# EAGLE board BMSv5_BatLength (EAGLE 7.6.0)
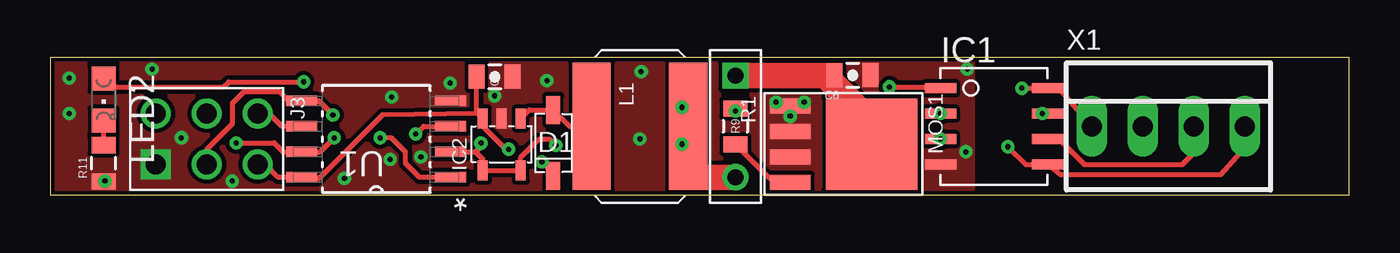
[diagram p0: board, top side]
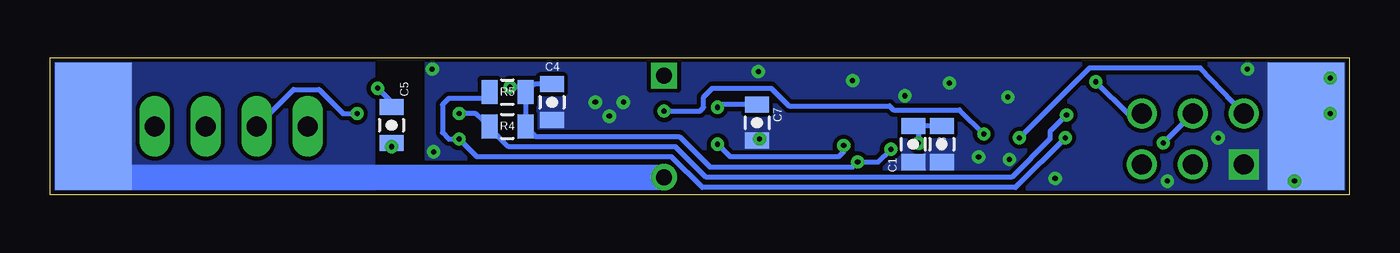
[diagram p1: board, bottom side, seen from below]

Size 64.77 x 6.86 mm. Coordinates in mm from the lower left corner, seen from the top.
Outline: 0,0 64.77,0 64.77,6.86 0,6.86 0,0
Copper layers (1*16): Top 0.035mm / dielectric 1.5mm / Bottom 0.035mm
Design rules "PCBWAY *": minimum track width 10mil, minimum drill 10mil, track to track 8mil, track to pad 8mil, pad to pad 8mil, via to via 8mil, smd to smd 8mil, copper to edge 8mil, drill to drill 8mil, minimum pad ring 10mil, minimum via ring 8mil, stop-mask expansion 4mil, vias tented up to drill 0mil, thermal gap 10mil

## Footprints (pad centres in the part's own frame; a part is rotated, then mirrored left to right if it is on the bottom)
0805-CAP = smd 0.8 x 1.2: 1 -0.9,0; 2 0.9,0
SOD-123 = smd 1.4 x 0.7: ANODE 0,0; CATHODE 3.3,0
SOIC-8 = smd 1.575 x 0.508: P$1 0,3.81; P$2 0,2.54; P$3 0,1.27; P$4 0,0; P$5 5.334,0; P$6 5.334,1.27; P$7 5.334,2.54; P$8 5.334,3.81
SOT-23 = smd 1 x 0.5: 1 1.29,-0.92; 2 1.29,0.03; 3 1.29,0.98; 4 -1.31,0.98; 5 -1.31,-0.92
SMD_PAD_.15X.25 = smd 3.81 x 6.35: P$1 0,0
2X3PIN_.1' = drill 0.991: P$1 -1.27,1.27; P$2 1.27,1.27; P$3 -1.27,-1.27; P$4 1.27,-1.27; P$5 -1.27,-3.81 | drill 0.991 square: P$6 1.27,-3.81
6X6MM_IND = smd 1.905 x 6.35: P$1 -2.413,0; P$2 2.413,0
CHIPLED_0805 = smd 1.2 x 1.2: A 0,-1.05; C 0,1.05
LFPAK = smd 0.762 x 2.032: P$1 0,0; P$2 1.27,0; P$3 2.54,0; P$4 3.81,0 | smd 4.572 x 4.572: P$5 1.905,4.064
TO-220-2 = drill 0.8 square: P$1 -2.54,0 | drill 0.8: P$2 2.54,0
0805 = smd 0.8 x 1.2: 1 -0.9,0; 2 0.9,0
SOIC127P798X216-8N = smd 1.549 x 0.533: 1 -3.708,1.905; 2 -3.708,0.635; 3 -3.708,-0.635; 4 -3.708,-1.905; 5 3.708,-1.905; 6 3.708,-0.635; 7 3.708,0.635; 8 3.708,1.905
22-23-2041 = drill 1 long: 1 -3.81,0; 2 -1.27,0; 3 1.27,0; 4 3.81,0

## Placement (x,y rotation side)
C1  10uF  [0805-CAP]  21.74,2.54 90 bottom
C2  10uF  [0805-CAP]  22.16,5.91 0 top
C3  10uF  [0805-CAP]  20.32,2.54 270 bottom
C4  10uF  [0805-CAP]  39.75,4.64 270 bottom
C5  10uF  [0805-CAP]  47.75,3.49 270 bottom
C6  10uF  [0805-CAP]  40.01,5.98 0 top
C7  10uF  [0805-CAP]  29.53,3.62 270 bottom
D1  DIODE_SCHOTTKYSOD-123  [SOD-123]  25.08,4.25 270 top
IC1  SI8600_DUALCHANNELISO  [SOIC-8]  44.39,1.52 0 top
IC2  SP6641  [SOT-23]  22.54,2.54 90 top
J1  CONNECTOR_1PIN  [SMD_PAD_.15X.25]  62.61,3.43 0 bottom
J2  CONNECTOR_1PIN  [SMD_PAD_.15X.25]  2.16,3.43 0 bottom
J3  ISPHEADER  [2X3PIN_.1']  9.08,2.79 270 top
L1  22uH  [6X6MM_IND]  29.4,3.43 0 top
LED2  [CHIPLED_0805]  2.67,4.76 180 top
MOS1  MOS_N_LOGIC_PSMN7R0  [LFPAK]  36.89,4.45 270 top
R1  .37  [TO-220-2]  34.16,3.43 270 top
R4  10k  [0805]  41.97,3.43 0 bottom
R5  10k  [0805]  41.97,5.14 0 bottom
R9  180  [0805]  34.16,3.43 270 top
R11  390  [0805]  2.67,1.59 90 top
U1  ATTINY85-20SU  [SOIC127P798X216-8N]  16.26,2.79 180 top
X1  22-23-2041  [22-23-2041]  55.75,3.43 0 top

## Library data of the parts
C1-C7 = SparkFun-Capacitors; PROD_ID: CAP-11330
D1 IC1 IC2 J1-J3 L1 MOS1 R1 = lolomolo
LED2 = adafruit
R4 R5 R9 R11 = SparkFun-Resistors; PROD_ID: RES-11622
U1 = Atmel_By_element14_Batch_1-00; MPN: ATTINY85-20SU; OC_FARNELL: 1455164; OC_NEWARK: 58M3797; PACKAGE: SOIC-8; SUPPLIER: Atmel
X1 = con-molex; MF: MOLEX; MPN: 22-23-2041; OC_FARNELL: 1462920; OC_NEWARK: 38C0355

## Nets
5V: C2.1 C4.1 D1.CATHODE IC1.P$1 IC2.3 J3.P$2 R4.2 R5.2 U1.8
5V_VIR: C5.1 IC1.P$8 X1.1
GATE: R9.1 U1.3
GND: C1.1 C2.2 C3.2 C4.2 C6.2 C7.2 IC1.P$4 IC2.2 J2.P$1 J3.P$6 MOS1.P$1 MOS1.P$2 MOS1.P$3 R11.1 U1.4
GND_VIR: C5.2 IC1.P$5 X1.4
MISO: J3.P$1 LED2.A U1.6
MOSI: IC1.P$2 J3.P$4 R4.1 U1.5
N$2: MOS1.P$4 R9.2
N$4: LED2.C R11.2
N$14: C6.1 MOS1.P$5 R1.P$1
N$29: D1.ANODE IC2.1 L1.P$1
RESET: J3.P$5 U1.1
SCK: IC1.P$3 J3.P$3 R5.1 U1.7
SCL: IC1.P$6 X1.3
SDA: IC1.P$7 X1.2
VBAT: C1.2 C3.1 C7.1 IC2.4 IC2.5 J1.P$1 L1.P$2 R1.P$2 U1.2

## Tracks (layer width: path | path; a pad name or v marks a point on that pad's centre or on a via)
5V  (via drill 0.25)
  Top 0.254: J3.P$2 10.73,1.52 11.37,0.89 U1.8 13.4,0.83 16.57,4 21.33,4.06 IC2.3 | 24.38,1.65 v24.51,1.65 25.08,1.08 D1.CATHODE | v41.85,5.4 44.45,5.4 IC1.P$1 | IC2.3 21.59,3.8 21.59,3.43 22.73,2.29 v22.86,2.29 | IC2.3 21.26,4.13 C2.1
  Bottom 0.254: R5.2 R4.2 40.57,2.92 33.4,2.92 31.88,1.4 24.77,1.4 v24.51,1.65 23.5,1.65 v22.86,2.29 | R5.2 41.07,5.39 v41.85,5.4 | C4.1 40.62,5.54 R5.2
5V_VIR  (via drill 0.25)
  Top 0.254: X1.1 50.29,5.33 IC1.P$8 v48.45,5.33
  Bottom 0.254: 51.89,3.43 X1.1 | C5.1 47.75,4.64 v48.45,5.33
GATE  (via drill 0.25)
  Top 0.254: R9.1 34.17,4.33 v34.16,4.19 | v18.22,3.05 18.61,3.43 U1.3
  Bottom 0.254: v34.16,4.19 32.38,4.19 32.19,4.38 32.19,4.89 31.75,5.33 28.83,5.33 27.94,4.45 22.92,4.45 22.73,4.25 19.43,4.25 v18.22,3.05
GND  (via drill 0.25)
  other vias: 9.08,0.7 5.08,6.29 36.89,3.94 36.2,4.64 37.59,4.64 45.72,6.29 18.48,1.91 16.95,1.78 14.67,0.83 17.02,4.89 24.77,5.71 19.94,5.59 22.16,4.95 29.46,6.16 29.4,2.79 45.66,2.16 2.73,0.7 0.95,5.84 0.95,4.06 6.54,2.86
  pour Bottom (no thermals): 0,6.86 45.97,6.86 45.97,0 0,0
  pour Top (no thermals): 0,6.86 45.97,6.86 45.97,0 0,0
GND_VIR  (via drill 0.25)
  Top 0.254: X1.4 59.56,2.35 58.36,1.02 50.35,1.02 IC1.P$5 48.64,1.52 v47.75,2.41
  Bottom 0.254: C5.2 v47.75,2.41
MISO  (via drill 0.25)
  Top 0.254: U1.6 11.56,3.43 10.92,4.06 J3.P$1 | LED2.A 3.01,5.65 3.27,5.4 8.64,5.4 8.89,5.65 v12.64,5.65
  Bottom 0.254: v12.64,5.65 11.05,4.06 J3.P$1
MOSI  (via drill 0.25)
  Top 0.254: v14.1,4 13.4,4.7 U1.5 11.87,4.7 11.43,5.14 9.65,5.14 9.08,4.57 9.08,3.56 7.81,2.29 J3.P$4
  Bottom 0.254: v14.1,4 14.92,3.17 14.92,2.79 16.83,0.89 32.07,0.89 33.59,2.41 41.91,2.41 42.87,3.38 R4.1 43.57,4.06 IC1.P$2
  other vias: 44.39,4.06
N$2
  Top 0.254: MOS1.P$4 36.08,0.62 35.76,0.93 R9.2
N$4
  Top 0.254: R11.2 LED2.C
N$14
  Top 0.254: C6.1 39.1,5.7 38.99,5.59
  Top 1.27: R1.P$1 38.61,5.97 38.99,5.59 40.83,3.75 40.83,2.67 MOS1.P$5
N$29
  Top 0.254: IC2.1 23.89,4.25 D1.ANODE 25.91,3.43 L1.P$1
RESET  (via drill 0.25)
  Top 0.254: U1.1 18.41,0.89 17.72,1.59 17.72,2.16 17.02,2.86 v16.45,2.86
  Bottom 0.254: J3.P$5 7.43,6.35 12.95,6.35 v16.45,2.86
SCK  (via drill 0.25)
  Top 0.254: v9.27,2.6 11.18,2.6 11.62,2.16 U1.7 13.46,2.16 v14.16,2.86
  Bottom 0.254: J3.P$3 v9.27,2.6 | v14.16,2.86 16.64,0.38 32.26,0.38 33.78,1.91 43.5,1.91 IC1.P$3 44.9,2.79 45.21,3.11 45.21,4.51 44.9,4.83 43.13,4.83 R5.1
  other vias: 44.39,2.79
SCL
  Top 0.254: IC1.P$6 50.29,2.79 51.56,1.52 56.45,1.52 57.02,2.1 X1.3
SDA  (via drill 0.25)
  Top 0.254: v49.47,4.06 IC1.P$7
  Bottom 0.254: 49.46,4.05 v49.47,4.06 50.16,4.06 51.37,5.27 52.64,5.27 X1.2
VBAT  (via drill 0.25)
  Top 0.254: 23.44,1.21 IC2.5 | U1.2 21.21,2.16 | 31.94,1.4 32.07,1.4 L1.P$2 | 21.21,2.16 21.56,1.81 IC2.4 IC2.5 | IC2.5 23.46,1.87 24.38,2.79 24.89,2.79 v25.21,2.48 | v31.5,2.54 31.3,2.92 L1.P$2 | v31.5,4.38 31.56,3.68 L1.P$2 | 21.21,2.16 21.47,2.42 v21.47,2.59
  Top 1.27: R1.P$2 32.45,0.89 31.94,1.4
  Bottom 0.254: v25.21,2.48 25.21,2.16 25.46,1.91 30.86,1.91 v31.5,2.54 | C3.1 C1.2 21.47,3.17 v21.47,2.59 | 31.5,4.25 v31.5,4.38 31.36,4.52 C7.1
  Bottom 1.27: J1.P$1 62.61,0.89 R1.P$2
  pour Bottom (no thermals): 48.7,6.86 48.7,0 64.77,0 64.77,6.86